# EAGLE board alcohal_sensor_and_send_sms_using_gsm (EAGLE 6.1)
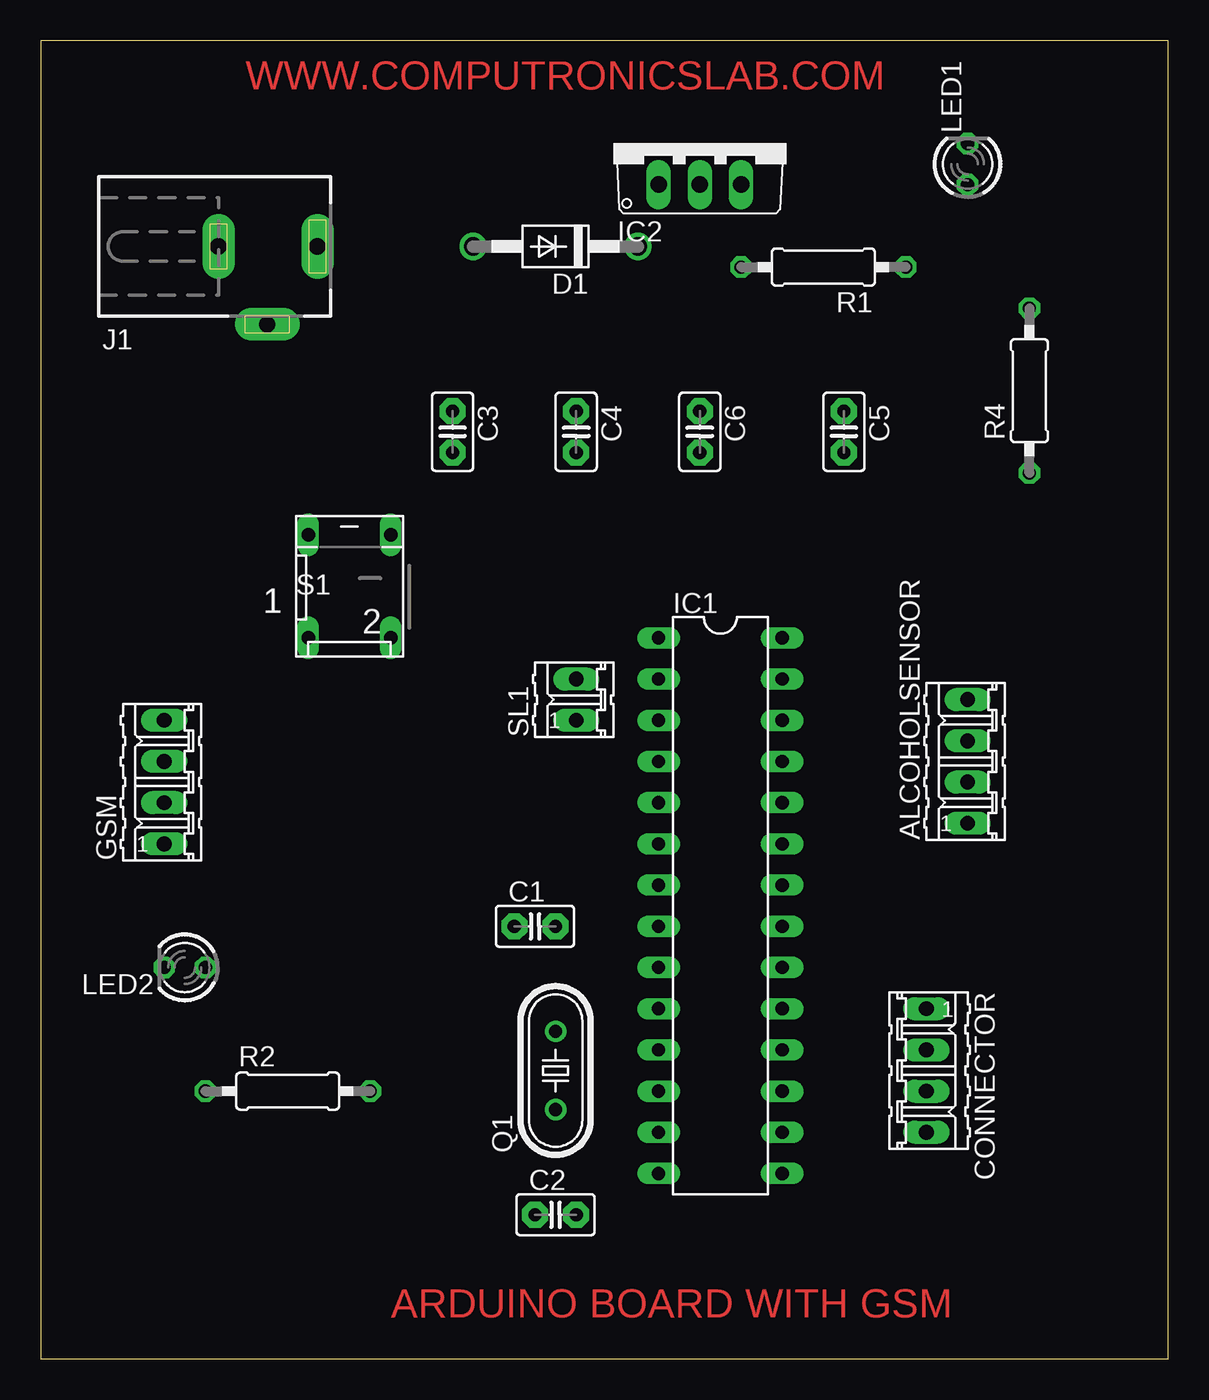
[diagram p0: board, top side]
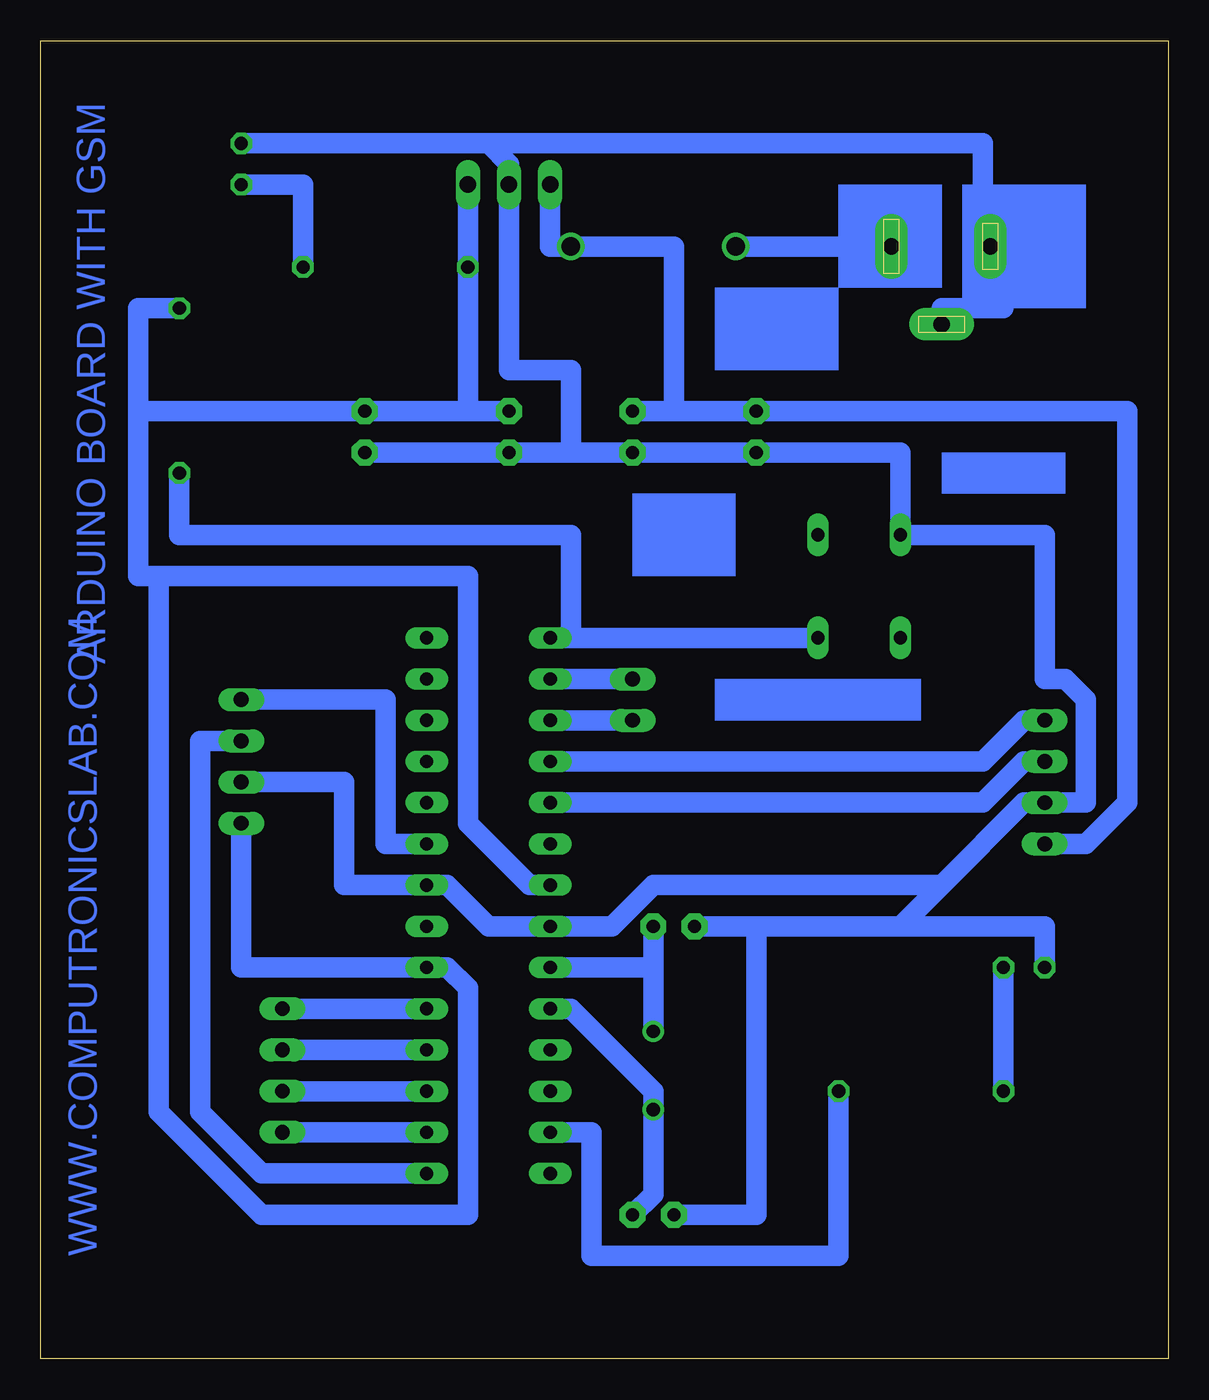
[diagram p1: board, bottom side, seen from below]

Size 69.52 x 81.27 mm. Coordinates in mm from the lower left corner, seen from the top.
Outline: 0,0 69.52,0 69.52,81.27 0,81.27 0,0
Copper layers (1*16): Top 0.035mm / dielectric 1.5mm / Bottom 0.035mm
Design rules: minimum track width 50mil, minimum drill 24mil, track to track 8mil, track to pad 8mil, pad to pad 8mil, via to via 8mil, smd to smd 8mil, copper to edge 40mil, drill to drill 8mil, minimum pad ring 10mil, minimum via ring 8mil, stop-mask expansion 4mil, vias tented up to drill 0mil, thermal gap 10mil

## Footprints (pad centres in the part's own frame; a part is rotated, then mirrored left to right if it is on the bottom)
04P = drill 0.914 long: 1 -3.81,0; 2 -1.27,0; 3 1.27,0; 4 3.81,0
C2.5-2 = drill 0.813 pad 1.6 octagon: 1 -1.27,0; 2 1.27,0
DO41-10 = drill 1.118: A 5.08,0; C -5.08,0
DIL28-3 = drill 0.813 long: 1 -16.51,-3.81; 2 -13.97,-3.81; 3 -11.43,-3.81; 4 -8.89,-3.81; 5 -6.35,-3.81; 6 -3.81,-3.81; 7 -1.27,-3.81; 8 1.27,-3.81; 9 3.81,-3.81; 10 6.35,-3.81; 11 8.89,-3.81; 12 11.43,-3.81; 13 13.97,-3.81; 14 16.51,-3.81; 15 16.51,3.81; 16 13.97,3.81; 17 11.43,3.81; 18 8.89,3.81; 19 6.35,3.81; 20 3.81,3.81; 21 1.27,3.81; 22 -1.27,3.81; 23 -3.81,3.81; 24 -6.35,3.81; 25 -8.89,3.81; 26 -11.43,3.81; 27 -13.97,3.81; 28 -16.51,3.81
TO220V = drill 1.016 long: 1 -2.54,-2.54; 2 0,-2.54; 3 2.54,-2.54
DCJ0303 = drill 1 pad 2 long: 1 0,3.1; 2 4.8,0; 3 0,-3
LED3MM = drill 0.813 octagon: A -1.27,0; K 1.27,0
HC49/S = drill 0.813: 1 -2.413,0; 2 2.413,0
0207/10 = drill 0.813 octagon: 1 -5.08,0; 2 5.08,0
DP-02 = drill 0.813 long: 1 -2.54,-2.54; 2 2.54,-2.54; 3 2.54,3.81; 4 -2.54,3.81
02P = drill 0.914 long: 1 -1.27,0; 2 1.27,0

## Placement (x,y rotation side)
ALCOHOLSENSOR  [04P]  57.15,36.83 90 top
C1  22pf  [C2.5-2]  30.48,26.67 0 top
C2  22pf  [C2.5-2]  31.75,8.89 0 top
C3  100UF  [C2.5-2]  25.4,57.15 270 top
C4  0.1uf  [C2.5-2]  33.02,57.15 270 top
C5  0.1uf  [C2.5-2]  49.53,57.15 270 top
C6  4.7uf  [C2.5-2]  40.64,57.15 270 top
CONNECTOR  4 pin  [04P]  54.61,17.78 270 top
D1  1N4007  [DO41-10]  31.75,68.58 180 top
GSM  [04P]  7.62,35.56 90 top
IC1  ATMEGA328  [DIL28-3]  41.91,27.94 270 top
IC2  7805  [TO220V]  40.64,74.93 0 top
J1  [DCJ0303]  13.97,68.58 270 top
LED1  [LED3MM]  57.15,73.66 90 top
LED2  [LED3MM]  8.89,24.13 180 top
Q1  16MHZ  [HC49/S]  31.75,17.78 90 top
R1  220R  [0207/10]  48.26,67.31 180 top
R2  330R  [0207/10]  15.24,16.51 0 top
R4  10K  [0207/10]  60.96,59.69 90 top
S1  [DP-02]  19.05,46.99 0 top
SL1  2 pin  [02P]  33.02,40.64 90 top

## Library data of the parts
ALCOHOLSENSOR CONNECTOR GSM SL1 = con-amp-quick; OC_FARNELL: unknown; OC_NEWARK: unknown
C1-C6 = capacitor-wima
D1 = diode
IC1 = quantum-research-group; OC_FARNELL: unknown; OC_NEWARK: unknown
IC2 = linear
J1 = con-jack; OC_FARNELL: unknown; OC_NEWARK: unknown
LED1 LED2 = led
Q1 = crystal; OC_FARNELL: 1667008; OC_NEWARK: unknown
R1 R2 R4 = rcl
S1 = switch-dil; MPN: MCDP02; OC_FARNELL: 1255233; OC_NEWARK: 26M1095

## Nets
N$1: C1.2 IC1.9 Q1.2
N$2: C2.2 IC1.10 Q1.1
N$3: D1.A J1.1
N$4: ALCOHOLSENSOR.1 C5.1 C6.1 IC1.7 IC1.20 IC2.3 R1.2 R4.2
N$5: ALCOHOLSENSOR.2 C1.1 C2.1 C3.2 C4.2 C5.2 C6.2 GSM.2 IC1.8 IC1.22 IC2.2 J1.2 J1.3 LED1.K LED2.K S1.4
N$6: LED1.A R1.1
N$7: C3.1 C4.1 D1.C GSM.1 IC2.1
N$8: GSM.4 IC1.4
N$9: GSM.3 IC1.5
N$10: IC1.3 SL1.1
N$11: IC1.2 SL1.2
N$12: ALCOHOLSENSOR.3 IC1.15
N$13: ALCOHOLSENSOR.4 IC1.23
N$14: CONNECTOR.1 IC1.19
N$15: CONNECTOR.2 IC1.18
N$16: CONNECTOR.3 IC1.17
N$17: CONNECTOR.4 IC1.16
N$21: IC1.13 R2.2
N$31: IC1.1 R4.1 S1.2
N$32: LED2.A R2.1

## Tracks (layer width: path | path; a pad name or v marks a point on that pad's centre or on a via)
N$1
  Bottom 1.27: C1.2 31.75,24.13 | 31.75,24.13 Q1.2 | 31.75,24.13 IC1.9
N$2
  Bottom 1.27: C2.2 31.75,10.16 31.75,15.24 Q1.1 31.75,16.51 36.83,21.59 IC1.10
N$3
  Bottom 1.27: J1.1 D1.A
N$4
  Bottom 1.27: IC2.3 R1.2 43.18,58.42 | 43.18,58.42 C5.1 63.5,58.42 | 43.18,58.42 C6.1 | ALCOHOLSENSOR.1 57.15,26.67 57.15,24.13 48.26,24.13 IC1.20 44.45,24.13 43.18,22.86 43.18,8.89 55.88,8.89 62.23,15.24 62.23,48.26 57.15,48.26 | IC1.7 39.37,29.21 43.18,33.02 43.18,48.26 57.15,48.26 | 57.15,48.26 63.5,48.26 63.5,54.61 63.5,58.42 | 63.5,58.42 63.5,64.77 R4.2
N$5
  Bottom 1.27: J1.2 13.97,64.77 10.16,64.77 10.16,68.58 J1.3 11.43,68.58 11.43,74.93 41.91,74.93 | 41.91,74.93 LED1.K | 41.91,74.93 40.64,73.66 IC2.2 40.64,60.96 36.83,60.96 36.83,55.88 | 36.83,55.88 C6.2 C5.2 | ALCOHOLSENSOR.2 50.8,35.56 50.8,29.21 IC1.22 44.45,29.21 41.91,26.67 IC1.8 34.29,26.67 31.75,29.21 13.97,29.21 | LED2.K 7.62,26.67 12.7,26.67 16.51,26.67 | C1.1 16.51,26.67 | 16.51,26.67 13.97,29.21 | 13.97,29.21 8.89,34.29 GSM.2 5.08,34.29 5.08,40.64 6.35,41.91 7.62,41.91 7.62,50.8 S1.4 16.51,55.88 C3.2 C4.2 35.56,55.88 36.83,55.88 | 16.51,26.67 25.4,26.67 25.4,8.89 C2.1
N$6
  Bottom 1.27: R1.1 53.34,72.39 LED1.A
N$7
  Bottom 1.27: IC2.1 38.1,68.58 D1.C 30.48,68.58 30.48,58.42 26.67,58.42 | GSM.1 5.08,31.75 2.54,34.29 2.54,58.42 C3.1 26.67,58.42 | 26.67,58.42 C4.1
N$8
  Bottom 1.27: IC1.4 11.43,36.83 8.89,39.37 GSM.4
N$9
  Bottom 1.27: IC1.5 11.43,34.29 8.89,36.83 GSM.3
N$10
  Bottom 1.27: SL1.1 IC1.3
N$11
  Bottom 1.27: SL1.2 IC1.2
N$12
  Bottom 1.27: IC1.15 55.88,11.43 59.69,15.24 59.69,38.1 ALCOHOLSENSOR.3
N$13
  Bottom 1.27: IC1.23 46.99,31.75 48.26,31.75 48.26,40.64 55.88,40.64 ALCOHOLSENSOR.4
N$14
  Bottom 1.27: CONNECTOR.1 IC1.19
N$15
  Bottom 1.27: CONNECTOR.2 IC1.18
N$16
  Bottom 1.27: CONNECTOR.3 IC1.17
N$17
  Bottom 1.27: CONNECTOR.4 IC1.16
N$21
  Bottom 1.27: R2.2 20.32,6.35 33.02,6.35 35.56,6.35 35.56,8.89 35.56,13.97 IC1.13
N$31
  Bottom 1.27: 36.83,44.45 S1.2 | R4.1 60.96,50.8 57.15,50.8 43.18,50.8 36.83,50.8 36.83,49.53 36.83,44.45 | 36.83,44.45 IC1.1
N$32
  Bottom 1.27: LED2.A R2.1
(copper drawn outside any net)
  shapes: Bottom area x6

## Text on the board
Top: WWW.COMPUTRONICSLAB.COM | ARDUINO BOARD WITH GSM
Bottom: ARDUINO BOARD WITH GSM | WWW.COMPUTRONICSLAB.COM